# EAGLE board circuitos (EAGLE 9.7.0)

Size 28.65 x 12.66 mm. Coordinates in mm from the lower left corner, seen from the top.
Outline: 0,0 28.65,0 28.65,12.66 0,12.66 0,0
Copper layers (1*16): Top 0.035mm / dielectric 1.5mm / Bottom 0.035mm
Design rules "default": minimum track width 6mil, minimum drill 0.35mm, track to track 6mil, track to pad 6mil, pad to pad 6mil, via to via 6mil, smd to smd 6mil, copper to edge 40mil, drill to drill 6mil, minimum pad ring 10mil, minimum via ring 8mil, stop-mask expansion 4mil, vias tented up to drill 0mil, thermal gap 10mil

## Footprints (pad centres in the part's own frame; a part is rotated, then mirrored left to right if it is on the bottom)
CAP-THRU-2.54MM = drill 1.016 pad 1.88: 1 -1.27,0; 2 1.27,0
RESAD1016W63L850D250B = drill 0.83 pad 1.43: 1 -5.08,0; 2 5.08,0

## Placement (x,y rotation side)
C1  100u  [CAP-THRU-2.54MM]  22.93,6.62 0 top
R1  1k  [RESAD1016W63L850D250B]  8.97,6.33 0 top

## Library data of the parts
C1 R1 = Tinkercad

## Nets
C1_1: C1.1 R1.2

## Tracks (layer width: path | path; a pad name or v marks a point on that pad's centre or on a via)
C1_1  (1 unrouted)